# Altium PCB PW.PcbDoc
Units mil, origin at the board's own origin, x right, y up, seen from the top; angles counter-clockwise.
Board outline 6000 x 4000 mil, 2 copper layers (Top Layer, Bottom Layer); 3 components, 2 nets, 38 pads, 0 vias.
Unrouted connection lines stored in the file: 4.
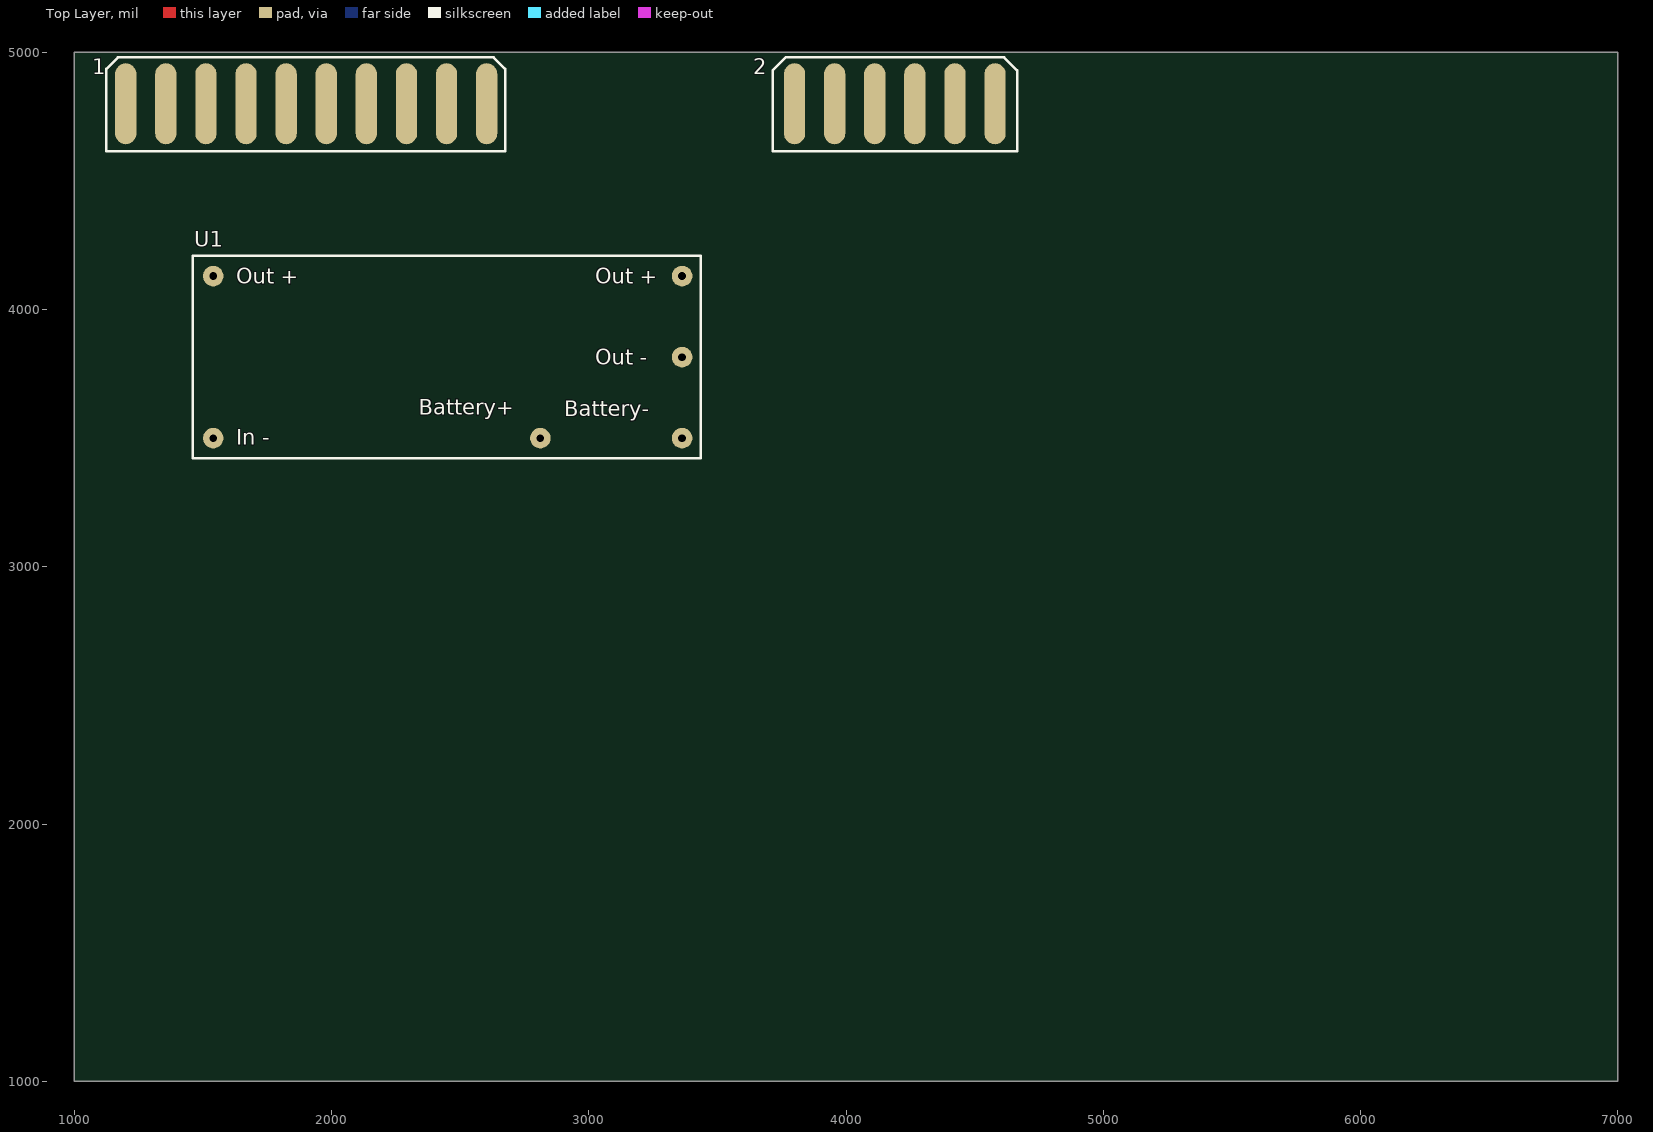
[diagram p0: Top Layer view]
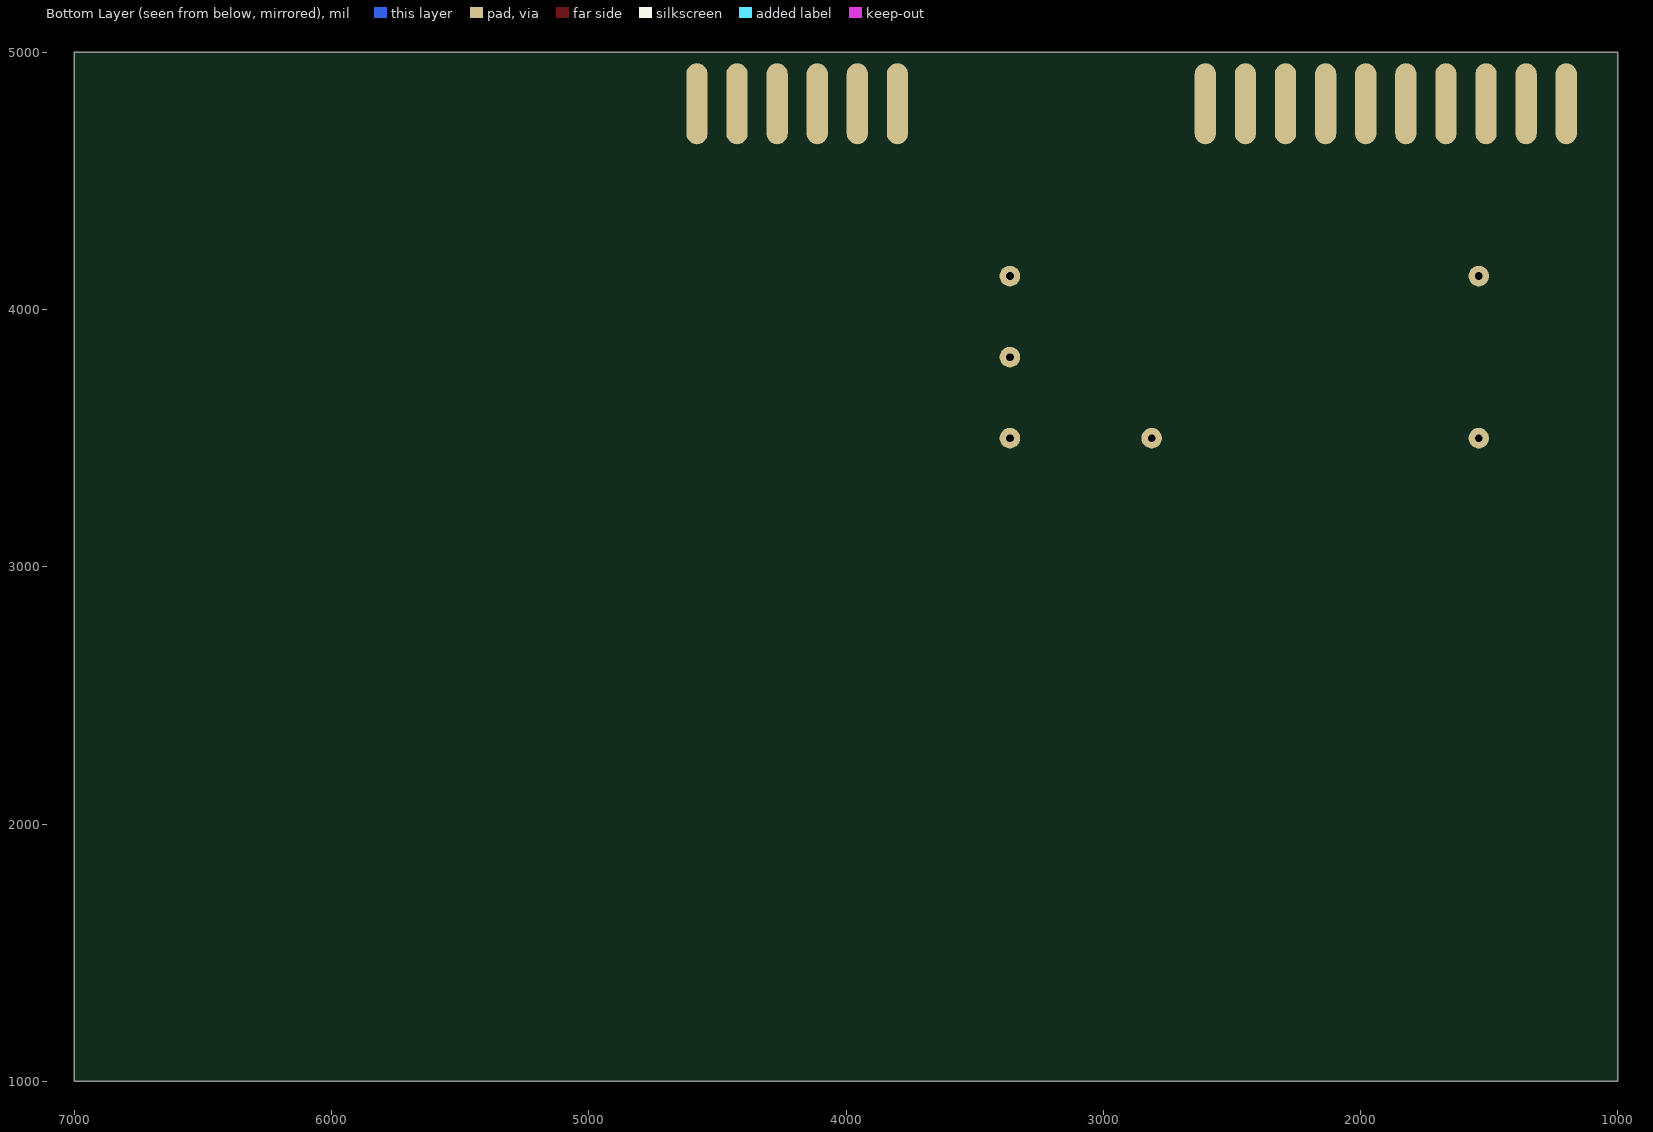
[diagram p1: Bottom Layer view, seen from below]

## Layer stack, top to bottom
Top Solder: solder mask 0.4, Solder Resist, Dk 3.5
Top Layer: signal copper 1.4
Dielectric 1: dielectric 12.6, FR-4, Dk 4.8
Bottom Layer: signal copper 1.4
Bottom Solder: solder mask 0.4, Solder Resist, Dk 3.5

## Board outline
1000,1000 7000,1000 7000,5000 1000,5000

## Design rules (kind name [scope] priority, off if disabled: settings)
Clearance [All] p1: gap=10 ignorepadtopadclearanceinfootprint=FALSE except(0: Arc-Hole Track-Hole SMDPad-Hole THPad-Hole Via-Hole Fill-Hole Poly-Hole Region-Hole Text-Hole)
PolygonConnect [All] p1: connectstyle=Relief reliefconductorwidth=10 reliefentries=4 polygonreliefangle="90 Angle" airgapwidth=10
RoutingVias [All] p1: holewidth=28 width=50 viastyle="Through Hole" minholewidth=28 minwidth=50 maxholewidth=28 maxwidth=50
SolderMaskExpansion [All] p1: expansion=4
Width [All] p1: maxlimit=10 minlimit=10 preferedwidth=10
30 further rules are at their usual default settings.

## Components (designator, comment, footprint, x,y, rotation, side; value= is the part's Value field where it differs from the comment)
1 "BTB-805-20P" BoardEdge-3.96-20P 1200,4800 r270 top
2 "BTB-805-12P" BoardEdge-3.96-12P 3800,4800 r270 top
U1 "12V-UPS-Module" 12V-UPS-Module 1540,3500.08 r0 top

## Footprints (in the part's own frame and the unit in brackets; to place one, negate y for a bottom-side part, rotate by r counter-clockwise, add the part's x,y. Pads: shape width x height; smd on the part's side, far side on the other; paste and mask are expansions set on the pad)
12V-UPS-Module [mil]
  round 80 hole 30: 1(0,629.92) 2(0,0) 3(1822.83,629.92) 4(1822.83,314.96) 5(1271.65,0) 6(1822.83,0)
  silkscreen extent -79,-79 1895,709
BoardEdge-3.96-12P [mm]
  oval 8x2.1 smd far side: 1(0,0) 3(0,3.96) 5(0,7.92) 7(0,11.88) 9(0,15.84) 11(0,19.8)
  oval 8x2.1 smd: 2(0,0) 4(0,3.96) 6(0,7.92) 8(0,11.88) 10(0,15.84) 12(0,19.8)
  silkscreen extent -4.57,-2.16 4.7,21.97
BoardEdge-3.96-20P [mm]
  oval 8x2.1 smd far side: 1(0,0) 3(0,3.96) 5(0,7.92) 7(0,11.88) 9(0,15.84) 11(0,19.8) 13(0,23.76) 15(0,27.72) 17(0,31.68) 19(0,35.64)
  oval 8x2.1 smd: 2(0,0) 4(0,3.96) 6(0,7.92) 8(0,11.88) 10(0,15.84) 12(0,19.8) 14(0,23.76) 16(0,27.72) 18(0,31.68) 20(0,35.64)
  silkscreen extent -4.57,-1.91 4.7,37.46

## Nets (pads, with @x,y where several pads share a name; then routed paths per layer and width w, separated by ;. In a path a pad name is that pad's centre, name@x,y a point inside that pad or via, vN(x,y) a via of type N, cw(c..) or ccw(c..) an arc to the next point about the centre after c; other vN are vias at no path point)
+12: 2.11 2.12 U1.3
GND: 2.9 2.10 U1.4
pads on no net: 1.1 1.2 1.3 1.4 1.5 1.6 1.7 1.8 1.9 1.10 1.11 1.12 1.13 1.14 1.15 1.16 1.17 1.18 1.19 1.20 2.1 2.2 2.3 2.4 2.5 2.6 2.7 2.8 U1.1 U1.2 U1.5 U1.6

## Text inside footprints (layer, text, board x,y; h text height)
U1: Top Overlay "Out +" at 3025,4100.08 h60; Top Overlay "Out -" at 3025,3785.08 h60; Top Overlay "Battery-" at 2905,3585.08 h60; Top Overlay "Battery+" at 2340,3590.08 h60; Top Overlay "In -" at 1630,3475.08 h60; Top Overlay "Out +" at 1630,4100.08 h60